# Altium PCB PCB_mecha-io-extension_2025-06-03.pcbdoc (part 2 of 2)
Units mil, origin at the board's own origin, x right, y up, seen from the top; angles counter-clockwise.
Board outline 3960 x 3230.45 mil, 2 copper layers (Top Layer, Bottom Layer); 20 components, 61 nets, 117 pads, 59 vias.
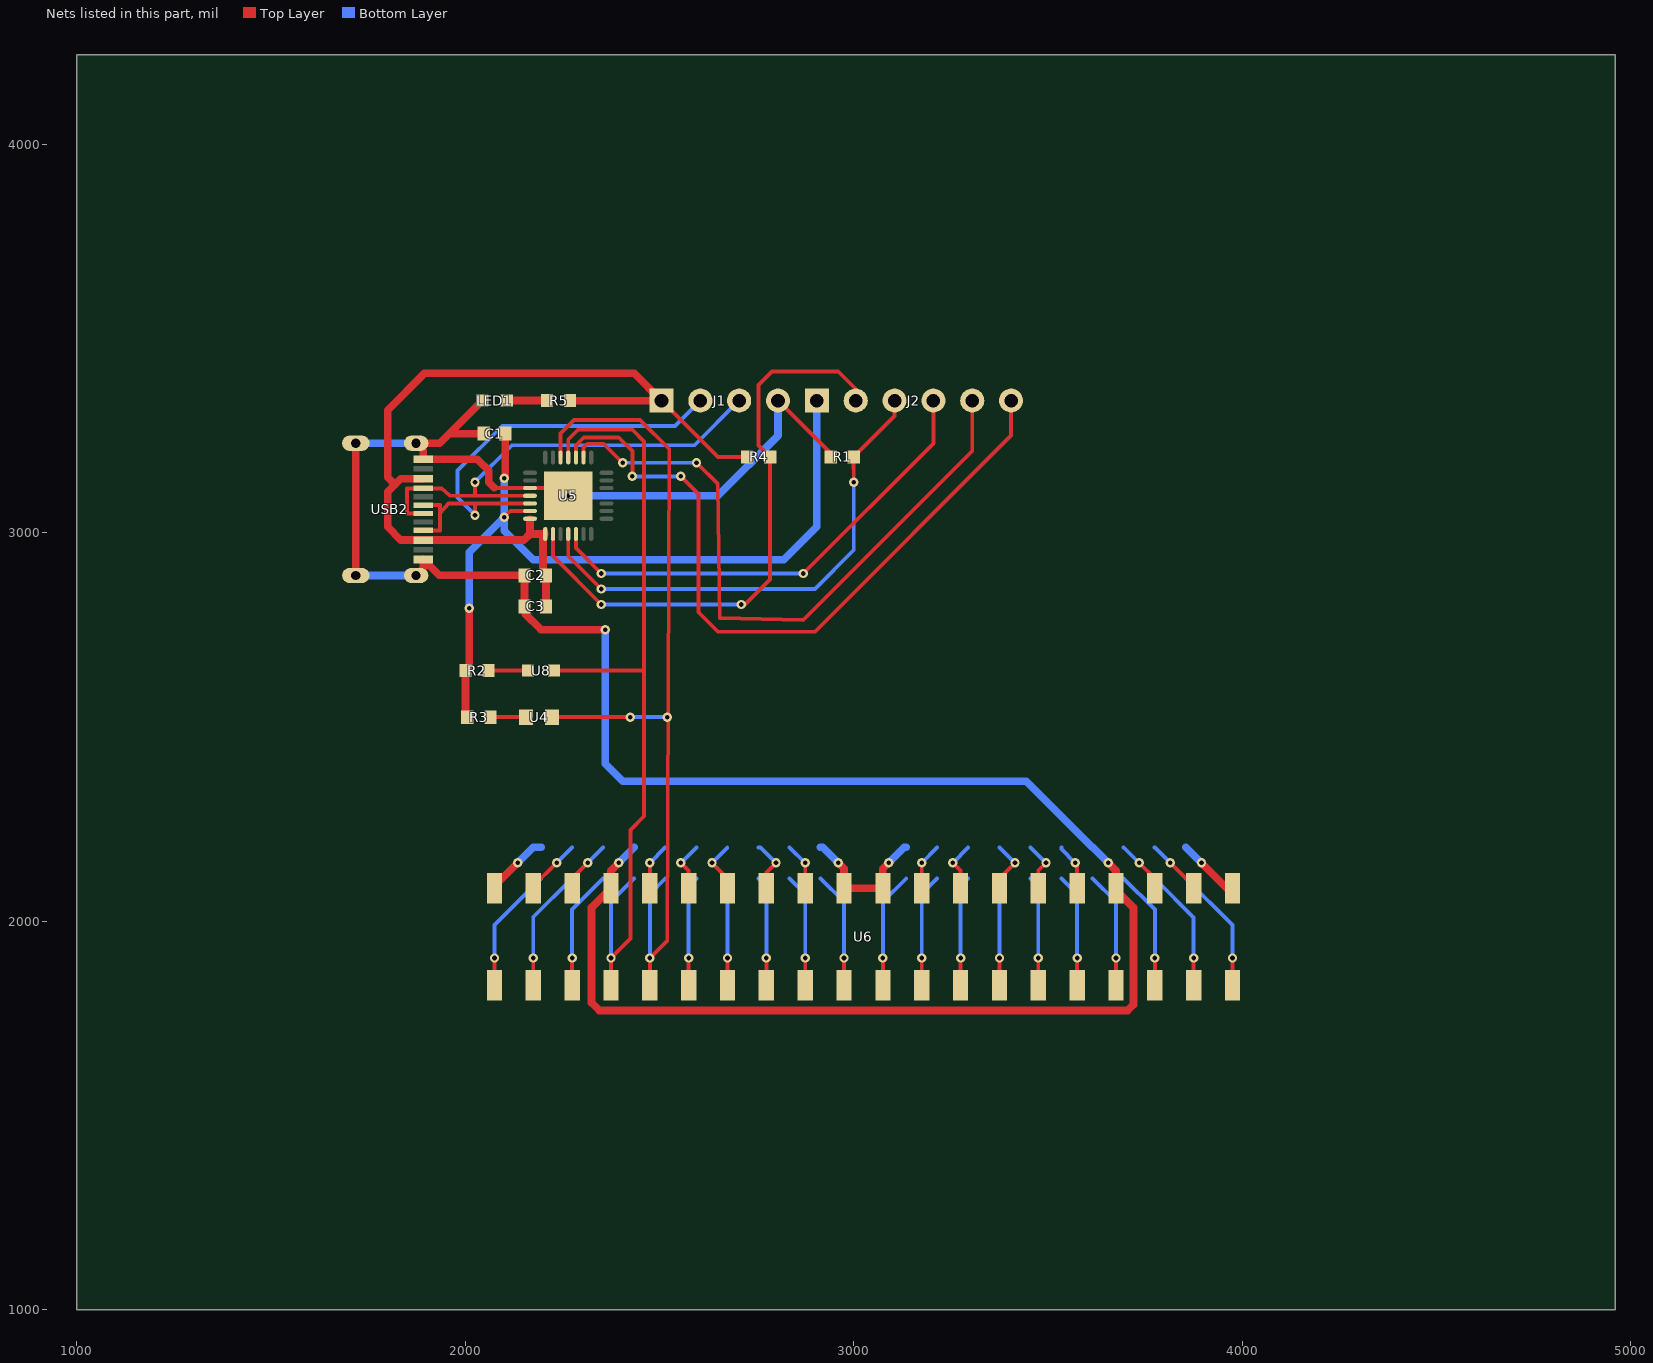
[diagram p2: the nets of this part, all layers, seen from the top]

## Via types
v1: diameter 24, hole 12, Top Layer to Bottom Layer, 59 vias

## Nets (pads, with @x,y where several pads share a name; then routed paths per layer and width w, separated by ;. In a path a pad name is that pad's centre, name@x,y a point inside that pad or via, vN(x,y) a via of type N, cw(c..) or ccw(c..) an arc to the next point about the centre after c; other vN are vias at no path point)
3V3: U6.19 U6.21 | length 365.8
  Top Layer w19.68: v1(2960,2150.45) 2975,2135.45 U6.21@2975,2085.45 U6.19@3075,2085.45 3075,2135.45 v1(3090,2150.45)
  Bottom Layer w19.68: 2914.45,2190.45 2920,2190.45 v1(2960,2150.45) ; v1(3090,2150.45) 3130,2190.45 3134.72,2190.45
3V3-VDD: C1.2 J2.1 R2.2 R3.2 U5.6 | length 2078.7
  Top Layer w10: v1(2100,3040.45) 2115.61,3056.06 U5.6@2166.58,3056.06
  Top Layer w19.68: R3.2@2005.35,2525.45 2000.34,2530.45 R2.2@2000.35,2645.45 2010,2655.11 v1(2010,2805.45) ; v1(2100,3140.45) 2102.56,3143.01 C1.2@2102.55,3255.45
  Bottom Layer w19.68: v1(2010,2805.45) 2010,2950.45 v1(2100,3040.45) ; v1(2100,3140.45) v1(2100,3040.45) ; J2.1@2905,3340.45 2905,3015.45 2820,2930.45 2300,2930.45 2175,2930.45 2100,3005.45 v1(2100,3040.45)
5V: U6.1 | length 164
  Top Layer w19.68: v1(3895,2150.45) 3960,2085.45 U6.1@3975,2085.45
  Bottom Layer w19.68: 3854.45,2190.45 3855,2190.45 v1(3895,2150.45)
5V-1: U6.39 | length 166.1
  Top Layer w19.68: U6.39@2075,2085.45 2075,2090.45 v1(2135,2150.45)
  Bottom Layer w19.68: v1(2135,2150.45) 2175,2190.45 2194.72,2190.45
5V-VBUS: C2.2 C3.2 J1.1 R4.2 R5.2 U5.7 U5.8 USB2.3 USB2.10 | length 2344.6
  Top Layer w10: J1.1@2505,3340.45 2650,3195.45 R4.2@2725.34,3195.45
  Top Layer w19.68: 1818.9,3124.35 1800,3143.15 1800,3315.45 1895,3410.45 2435,3410.45 J1.1@2505,3340.45 R5.2@2269.66,3340.45 ; USB2.3@1891.84,3139.59 1834.1,3139.55 1800,3105.45 1800,3015.45 1834.1,2981.35 1891.8,2981.35 2150.9,2981.35 2166.6,2997.05 ; U5.7@2166.6,3034.65 2166.6,2997.05 ; C3.2@2207.55,2810.45 C2.2@2207.55,2890.45 2200,2890.45 2200,2997.05 2204.1,2997.05 2166.6,2997.05
ADC1: U6.40 | length 324.7
  Top Layer w10: U6.40@2075,1835.45 v1(2075,1905.45)
  Bottom Layer w10: v1(2075,1905.45) 2075,1990.45 2195,2110.45
ADC2: U6.38 | length 316.3
  Top Layer w10: U6.38@2175,1835.45 v1(2175,1905.45)
  Bottom Layer w10: v1(2175,1905.45) 2175,2010.73 2274.72,2110.45
ADC3: U6.4 | length 316.5
  Top Layer w10: U6.4@3875,1835.45 v1(3875,1905.45)
  Bottom Layer w10: 3774.72,2110.45 3875,2010.17 v1(3875,1905.45)
ADC4: U6.2 | length 324.8
  Top Layer w10: U6.2@3975,1835.45 v1(3975,1905.45)
  Bottom Layer w10: 3854.72,2110.45 3975,1990.17 v1(3975,1905.45)
CTS: J2.5 U5.23 | length 1723.9
  Top Layer w10: U5.23@2304.4,3193.88 2304.4,3219.85 2313.93,3229.38 2356.07,3229.38 v1(2405,3180.45) ; v1(2595,3180.45) 2650,3125.45 2655,2780.45 2870,2775.45 3305,3210.45 J2.5@3305,3340.45
  Bottom Layer w10: v1(2405,3180.45) v1(2595,3180.45)
DBG_RX: U4.2 U5.26 U6.32 | length 2303.7
  Top Layer w10: U4.2@2223.47,2525.45 v1(2425,2525.45) ; U5.26@2245.3,3193.88 2245.3,3255.75 2280,3290.45 2450,3290.45 2525,3215.45 2520,1955.45 2520,1950.45 v1(2475,1905.45) U6.32@2475,1835.45
  Bottom Layer w10: v1(2425,2525.45) v1(2520,2525.45) ; v1(2475,1905.45) 2475,2070.73 2514.72,2110.45
DBG_TX: U5.25 U6.34 U8.2 | length 2160.8
  Top Layer w10: U8.2@2228.5,2645.45 2430.38,2645.45 2460,2645.45 ; U5.25@2265,3193.88 2265,3240.45 2290,3265.45 2430,3265.45 2460,3235.45 2460,2270.45 2425,2235.45 2425,1955.45 v1(2375,1905.45) U6.34@2375,1835.45
  Bottom Layer w10: v1(2375,1905.45) 2375,2050.73 2434.72,2110.45
DM: J1.2 U5.5 USB2.6 USB2.9 | length 1259.4
  Top Layer w10: USB2.9@1891.8,3006.35 1935,3006.35 1935,3071.25 USB2.6@1891.84,3071.28 ; 1935,3050.45 1957.16,3075.76 U5.5@2166.58,3075.76 ; v1(2025,3045.45) 2025,3072.09 2028.67,3075.76
  Bottom Layer w10: v1(2025,3045.45) 1980,3090.45 1980,3160.45 2095,3275.45 2540,3275.45 J1.2@2605,3340.45
DP: J1.3 U5.4 USB2.4 USB2.7 | length 1233.6
  Top Layer w10: USB2.7@1891.8,3049.65 1850,3049.65 1850,3114.55 USB2.4@1891.84,3114.59 1939.1,3114.55 1960,3095.45 U5.4@2166.58,3095.46 ; v1(2025,3130.45) 2025,3097.64 2027.19,3095.45
  Bottom Layer w10: v1(2025,3130.45) 2120,3225.45 2590,3225.45 J1.3@2705,3340.45
ESPI2_MISO: U6.16 | length 283.2
  Top Layer w10: U6.16@3275,1835.45 v1(3275,1905.45)
  Bottom Layer w10: v1(3275,1905.45) 3275,2090.73 3294.72,2110.45
ESPI2_MOSI: U6.18 | length 291.5
  Top Layer w10: U6.18@3175,1835.45 v1(3175,1905.45)
  Bottom Layer w10: v1(3175,1905.45) 3175,2070.73 3214.72,2110.45
ESPI2_SCLK: U6.14 | length 275
  Top Layer w10: U6.14@3375,1835.45 v1(3375,1905.45)
  Bottom Layer w10: 3374.7,2110.45 v1(3375,1905.45)
ESPI2_SS0: U6.12 | length 283.4
  Top Layer w10: U6.12@3475,1835.45 v1(3475,1905.45)
  Bottom Layer w10: 3454.72,2110.45 3475,2090.17 v1(3475,1905.45)
GND: C1.1 C2.1 C3.1 J1.4 LED1.1 R1.1 U5.3 U5.29 U6.7 U6.33 USB2.1 USB2.12 USB2.13 USB2.14 USB2.15 USB2.16 | length 6967.1
  Top Layer w10: 2074.1,3116.35 2075.3,3115.16 U5.3@2166.58,3115.16 2245.3,3115.15 v1(2265,3095.45) ; J1.4@2805,3340.45 2940.34,3205.11 R1.1@2940.34,3195.45
  Top Layer w19.68: USB2.15@1718.16,2890.18 USB2.14@1718.16,3230.73 ; USB2.16@1873.28,2890.18 1891.84,2908.74 USB2.12@1891.84,2931.32 1932.7,2890.45 C2.1@2152.45,2890.45 C3.1@2152.45,2810.45 2155,2807.89 2155,2790.45 2195,2750.45 v1(2360,2750.45) ; USB2.1@1891.84,3189.59 2030.9,3189.55 2060,3160.45 2060,3130.45 2074.1,3116.35 ; USB2.1@1891.84,3189.59 1891.84,3212.17 USB2.13@1873.28,3230.73 1933.93,3230.73 LED1.1@2043.53,3340.32 ; 1961.72,3255.45 C1.1@2047.44,3255.45 ; v1(2395,2150.45) 2375,2130.45 U6.33@2375,2085.45 2325,2035.45 2325,1790.45 2345,1770.45 3705,1770.45 3720,1785.45 3720,2035.45 3675,2080.45 U6.7@3675,2085.45 3675,2130.45 v1(3655,2150.45)
  Bottom Layer w19.68: USB2.15@1718.16,2890.18 USB2.16@1873.28,2890.18 ; USB2.14@1718.16,3230.73 USB2.13@1873.28,3230.73 ; v1(2265,3095.45) 2650,3095.45 2805,3250.45 J1.4@2805,3340.45 ; v1(2360,2750.45) 2360,2405.45 2405,2360.45 3444.4,2360.45 3614.4,2190.45 ; v1(2395,2150.45) 2434.4,2190.45 ; 3614.45,2190.45 3615,2190.45 v1(3655,2150.45)
GPIO1_IO13: U6.20 | length 299.9
  Top Layer w10: U6.20@3075,1835.45 v1(3075,1905.45)
  Bottom Layer w10: v1(3075,1905.45) 3075,2050.45 3135,2110.45
GPIO2_IIO15: U6.30 | length 283.3
  Top Layer w10: U6.30@2575,1835.45 v1(2575,1905.45)
  Bottom Layer w10: v1(2575,1905.45) 2575,2090.45 2595,2110.45
GPIO2_IO12: U6.27 | length 137.9
  Top Layer w10: v1(2635,2150.45) 2675,2110.45 U6.27@2675,2085.45
  Bottom Layer w10: v1(2635,2150.45) 2674.45,2189.9 2674.45,2190.45
GPIO2_IO13: U6.8 | length 300
  Top Layer w10: U6.8@3675,1835.45 v1(3675,1905.45)
  Bottom Layer w10: 3614.72,2110.45 3675,2050.17 v1(3675,1905.45)
GPIO2_IO14: U6.10 | length 291.6
  Top Layer w10: U6.10@3575,1835.45 v1(3575,1905.45)
  Bottom Layer w10: 3535,2110.45 3575,2070.45 v1(3575,1905.45)
GPIO2_IO16: U6.28 | length 275
  Top Layer w10: U6.28@2675,1835.45 v1(2675,1905.45)
  Bottom Layer w10: 2674.7,2110.45 v1(2675,1905.45)
GPIO2_IO17: U6.26 | length 283.4
  Top Layer w10: U6.26@2775,1835.45 v1(2775,1905.45)
  Bottom Layer w10: 2754.72,2110.45 2775,2090.17 v1(2775,1905.45)
GPIO2_IO18: U6.24 | length 291.7
  Top Layer w10: U6.24@2875,1835.45 v1(2875,1905.45)
  Bottom Layer w10: 2834.72,2110.45 2875,2070.17 v1(2875,1905.45)
GPIO2_IO20: U6.13 | length 138.7
  Top Layer w10: U6.13@3375,2085.45 3375,2110.45 v1(3415,2150.45)
  Bottom Layer w10: 3374.45,2190.45 3375,2190.45 v1(3415,2150.45)
GPIO4_IO28: U6.22 | length 300
  Top Layer w10: U6.22@2975,1835.45 v1(2975,1905.45)
  Bottom Layer w10: 2914.72,2110.45 2975,2050.17 v1(2975,1905.45)
I2C2_SCL: U6.25 | length 137.5
  Top Layer w10: U6.25@2775,2085.45 2775,2125.45 v1(2800,2150.45)
  Bottom Layer w10: 2754.45,2190.45 2760,2190.45 v1(2800,2150.45)
I2C2_SDA: U6.23 | length 122.1
  Top Layer w10: U6.23@2875,2085.45 v1(2875,2150.45)
  Bottom Layer w10: 2834.45,2190.45 2835,2190.45 v1(2875,2150.45)
I2C4_SCL: U6.17 | length 121.3
  Top Layer w10: U6.17@3175,2085.45 v1(3175,2150.45)
  Bottom Layer w10: v1(3175,2150.45) 3214.45,2189.9 3214.45,2190.45
I2C4_SDA: U6.15 | length 129.6
  Top Layer w10: v1(3255,2150.45) 3275,2130.45 U6.15@3275,2085.45
  Bottom Layer w10: v1(3255,2150.45) 3294.45,2189.9 3294.45,2190.45
LED-P: LED1.2 R5.1 | length 103.9
  Top Layer w19.68: LED1.2@2106.48,3340.59 2210.2,3340.59 R5.1@2210.34,3340.45
PWM1: U6.36 | length 308
  Top Layer w10: U6.36@2275,1835.45 v1(2275,1905.45)
  Bottom Layer w10: v1(2275,1905.45) 2275,2030.73 2354.72,2110.45
PWM2: U6.6 | length 308.3
  Top Layer w10: U6.6@3775,1835.45 v1(3775,1905.45)
  Bottom Layer w10: 3694.72,2110.45 3775,2030.17 v1(3775,1905.45)
R2_1: R2.1 U8.1 | length 101.8
  Top Layer w10: R2.1@2059.66,2645.45 U8.1@2161.5,2645.45
R3_1: R3.1 U4.1 | length 91.9
  Top Layer w10: R3.1@2064.66,2525.45 U4.1@2156.54,2525.45
RESET: J2.2 R4.1 U5.9 | length 1520.3
  Top Layer w10: U5.9@2225.6,2997.03 2225.6,2939.85 v1(2350,2815.45) ; v1(2710,2815.45) 2720,2815.45 2784.66,2880.11 R4.1@2784.66,3195.45 2755,3225.11 2755,3380.45 2790,3415.45 2960,3415.45 3005,3370.45 J2.2@3005,3340.45
  Bottom Layer w10: v1(2350,2815.45) v1(2710,2815.45)
RTC: U6.5 | length 138.7
  Top Layer w10: v1(3735,2150.45) 3775,2110.45 U6.5@3775,2085.45
  Bottom Layer w10: 3694.45,2190.45 3695,2190.45 v1(3735,2150.45)
RTS: J2.6 U5.24 | length 1883
  Top Layer w10: U5.24@2284.7,3193.88 2284.7,3225.15 2305,3245.45 2320,3245.45 2395,3245.45 2430,3210.45 v1(2430,3145.45) ; v1(2555,3145.45) 2600,3100.45 2600,2795.45 2650,2745.45 2900,2745.45 3405,3250.45 J2.6@3405,3340.45
  Bottom Layer w10: v1(2430,3145.45) v1(2555,3145.45)
S$4834: 
S$4879: 
S$4904: 
S$4911: 
S$4942: 
S$4958: 
S$5049: 
S$5116: 
S$117197: 
S$117201: 
S$123016: 
SOC_RST: U6.3 | length 147
  Top Layer w10: v1(3815,2150.45) 3875,2090.45 U6.3@3875,2085.45
  Bottom Layer w10: 3774.45,2190.45 3775,2190.45 v1(3815,2150.45)
SUSPEND: J2.4 U5.12 | length 1232.4
  Top Layer w10: U5.12@2284.7,2997.03 2284.7,2960.75 v1(2350,2895.45) ; v1(2870,2895.45) 3205,3230.45 J2.4@3205,3340.45
  Bottom Layer w10: v1(2350,2895.45) v1(2870,2895.45)
SUSPEND#: J2.3 R1.2 U5.11 | length 1296.8
  Top Layer w10: U5.11@2265,2997.03 2265,2940.45 v1(2350,2855.45) ; R1.2@2999.66,3195.45 3105,3300.79 J2.3@3105,3340.45 ; R1.2@2999.66,3195.45 v1(3000,3130.45)
  Bottom Layer w10: v1(2350,2855.45) 2900,2855.45 3000,2955.45 v1(3000,3130.45)
UART3_RX: U6.29 | length 129.7
  Top Layer w10: v1(2555,2150.45) 2575,2130.45 U6.29@2575,2085.45
  Bottom Layer w10: v1(2555,2150.45) 2594.72,2190.17 2594.72,2190.45
UART3_TX: U6.31 | length 121.3
  Top Layer w10: U6.31@2475,2085.45 v1(2475,2150.45)
  Bottom Layer w10: v1(2475,2150.45) 2514.45,2189.9 2514.45,2190.45
UART4_RX: U6.11 | length 130.4
  Top Layer w10: U6.11@3475,2085.45 3475,2130.45 v1(3495,2150.45)
  Bottom Layer w10: 3454.45,2190.45 3455,2190.45 v1(3495,2150.45)
UART4_TX: U6.9 | length 121.7
  Top Layer w10: v1(3570,2150.45) 3575,2145.45 U6.9@3575,2085.45
  Bottom Layer w10: 3534.72,2190.45 3534.72,2185.73 v1(3570,2150.45)
USBDM: U6.37 | length 146.2
  Top Layer w10: U6.37@2175,2085.45 2175,2090.45 v1(2235,2150.45)
  Bottom Layer w10: v1(2235,2150.45) 2274.45,2189.9 2274.45,2190.45
USBDP: U6.35 | length 137.9
  Top Layer w10: U6.35@2275,2085.45 2275,2110.45 v1(2315,2150.45)
  Bottom Layer w10: v1(2315,2150.45) 2354.45,2189.9 2354.45,2190.45
pads on no net: U5.1 U5.2 U5.10 U5.13 U5.14 U5.15 U5.16 U5.17 U5.18 U5.19 U5.20 U5.21 U5.22 U5.27 U5.28 USB2.2 USB2.5 USB2.8 USB2.11

## Polygon pours and split planes (outlines as drawn)
GND on Top Layer "Top Layer-GND" (solid, pour order 0): 1550,2415.45 1550,3605.45 1500,3710.45 1505,3705.45 1530,3705.45 1525,3700.45 1505,3700.45 1550,3655.45 1550,3605.45 4450,3605.45 4450,2430.45 4445,2425.45 1560,2425.45 1550,2415.45
GND on Bottom Layer "Bottom Layer-GND" (solid, pour order 1): 1550,2425.45 1550,3705.45 1545,3705.45 1530,3730.45 1550,3710.45 1550,3705.45 4455,3705.45 4460,3700.45 4460,2440.45 4445,2425.45 1550,2425.45

## Keep-outs
Keep-Out Layer:
  lines w10: 1645,2740.45 1644.99,3285.2 cw(c1822.5,3282.95) 1820,3460.45 4225,3460.45 cw(c4225,3285.45) 4400,3285.45 4401.03,3056.49 cw(c4360,3056.49) 4360,3015.45 4285,3015.45 ccw(c4285,2882.38) 4151.93,2882.38 4151.93,1948.52 ccw(c4285,1948.52) 4285,1815.45 4355.86,1815.45 ; 1645.05,2741.43 ccw(c1681.02,2741.43) 1681.02,2705.45 ; 1649.44,1769.4 ccw(c1960,1821.87) 1960,1506.91 2436.38,1506.6 ; 1649.64,1769.47 cw(c1685,1782.97) 1690,1820.49 1755,1820.45 ccw(c1755,1953.52) 1888.07,1953.53 1890,2575.45 ; 1681.2,2705.45 1760,2705.45 ; 1761.01,2705.42 cw(c1757.5,2572.97) 1890,2572.97 ; 2439.03,1506.61 ccw(c2439.03,1542.59) 2475.01,1542.59 2475,1615.41 cw(c2608.07,1615.41) 2608.07,1748.48 ; 2606.3,1748.48 3433.07,1748.48 cw(c3433.08,1615.41) 3566.15,1615.41 ; 3566.07,1545.98 ccw(c3607.11,1545.98) 3607.11,1504.94 ; 3566.1,1545.95 3566.1,1615.45 ; 3609.61,1505 4085.98,1506.91 ccw(c4085.98,1821.87) 4396.53,1769.35 ccw(c4353.26,1772.4) 4355.24,1815.73

## Silkscreen, mask and mechanical layers (free items; w line width, h text height)
Bottom Overlay:
  text "5V-VBUS" at 2549.68,3265.45 h39.37 r90
  text "3v3-VDD" at 2944.68,3265.45 h39.37 r90
  text "SUSPEND#" at 3144.67,3264.76 h39.37 r88
  text "SUSPEND" at 3244.68,3265.45 h39.37 r90
  text "CTS" at 3349.68,3265.45 h39.37 r90
  text "DM" at 2644.68,3260.45 h39.37 r90
  text "DP" at 2744.68,3260.45 h39.37 r90
  text "GND" at 2849.68,3260.45 h39.37 r90
  text "RESET" at 3049.68,3260.45 h39.37 r90
  text "RTS" at 3449.68,3260.45 h39.37 r90

## Text inside footprints (layer, text, board x,y; h text height)
.1: Bottom Overlay "5V" at 3892.5,2319.39 h31.5 r90; Bottom Overlay "RTC" at 3722.5,2349.39 h31.5 r90; Bottom Overlay "ADC1" at 2222.5,2049.39 h31.5 r90; Bottom Overlay "ADC2" at 2302.5,2049.39 h31.5 r90; Bottom Overlay "PWM1" at 2382.5,2044.39 h31.5 r90; Bottom Overlay "DBG_TX" at 2462.5,2044.39 h31.5 r90; Bottom Overlay "DBG_RX" at 2542.5,2044.39 h31.5 r90; Bottom Overlay "GPIO2_IO15" at 2622.5,2044.39 h31.5 r90; Bottom Overlay "GPIO2_IO16" at 2702.5,2044.39 h31.5 r90; Bottom Overlay "GPIO2_IO17" at 2787.5,2044.39 h31.5 r90; Bottom Overlay "GPIO2_IO18" at 2862.5,2044.39 h31.5 r90; Bottom Overlay "GPIO4_IO28" at 2942.5,2044.39 h31.5 r90; Bottom Overlay "GPIO1_IO13" at 3172.5,2049.39 h31.5 r90; Bottom Overlay "ESPI2_MOSI" at 3252.5,2049.39 h31.5 r90; Bottom Overlay "ESPI2_MISO" at 3332.5,2049.39 h31.5 r90; Bottom Overlay "ESPI2_SCLK" at 3412.5,2049.39 h31.5 r90; Bottom Overlay "ESPI2_SS0" at 3492.5,2049.39 h31.5 r90; Bottom Overlay "GPIO2_IO14" at 3572.5,2049.39 h31.5 r90; Bottom Overlay "GPIO2_IO13" at 3647.5,2049.39 h31.5 r90; Bottom Overlay "PWM2" at 3732.5,2049.39 h31.5 r90; Bottom Overlay "ADC3" at 3812.5,2049.39 h31.5 r90; Bottom Overlay "ADC4" at 3892.5,2049.39 h31.5 r90; Bottom Overlay "SOM_RST" at 3802.5,2479.39 h31.5 r90; Bottom Overlay "GND" at 3642.5,2349.39 h31.5 r90; Bottom Overlay "UART4_TX" at 3562.5,2509.39 h31.5 r90; Bottom Overlay "UART4_RX" at 3477.5,2504.39 h31.5 r90; Bottom Overlay "GPIO2_IO12" at 3397.5,2514.39 h31.5 r90; Bottom Overlay "I2C4_SCL" at 3322.5,2484.39 h31.5 r90; Bottom Overlay "I2C4_SDA" at 3242.5,2489.39 h31.5 r90; Bottom Overlay "3v3" at 3162.5,2349.39 h31.5 r90; Bottom Overlay "3v3" at 2942.5,2344.39 h31.5 r90; Bottom Overlay "I2C2_SDA" at 2857.5,2484.39 h31.5 r90; Bottom Overlay "I2C2_SCL" at 2777.5,2484.39 h31.5 r90; Bottom Overlay "GPIO2_IO12" at 2702.5,2514.39 h31.5 r90; Bottom Overlay "UART3_RX" at 2622.5,2504.39 h31.5 r90; Bottom Overlay "UART3_TX" at 2532.5,2509.39 h31.5 r90; Bottom Overlay "GND" at 2457.5,2349.39 h31.5 r90; Bottom Overlay "USB_DP" at 2382.5,2444.39 h31.5 r90; Bottom Overlay "USB_DM" at 2302.5,2449.39 h31.5 r90; Bottom Overlay "5V" at 2222.5,2319.39 h31.5 r90